# Altium PCB MainBoard.PcbDoc
Units mm, origin at the board's own origin, x right, y up, seen from the top; angles counter-clockwise.
Board outline 127.13 x 121.92 mm, 2 copper layers (Top Layer, Bottom Layer), stack 1.586 mm thick; 101 components, 54 nets, 362 pads, 56 vias.
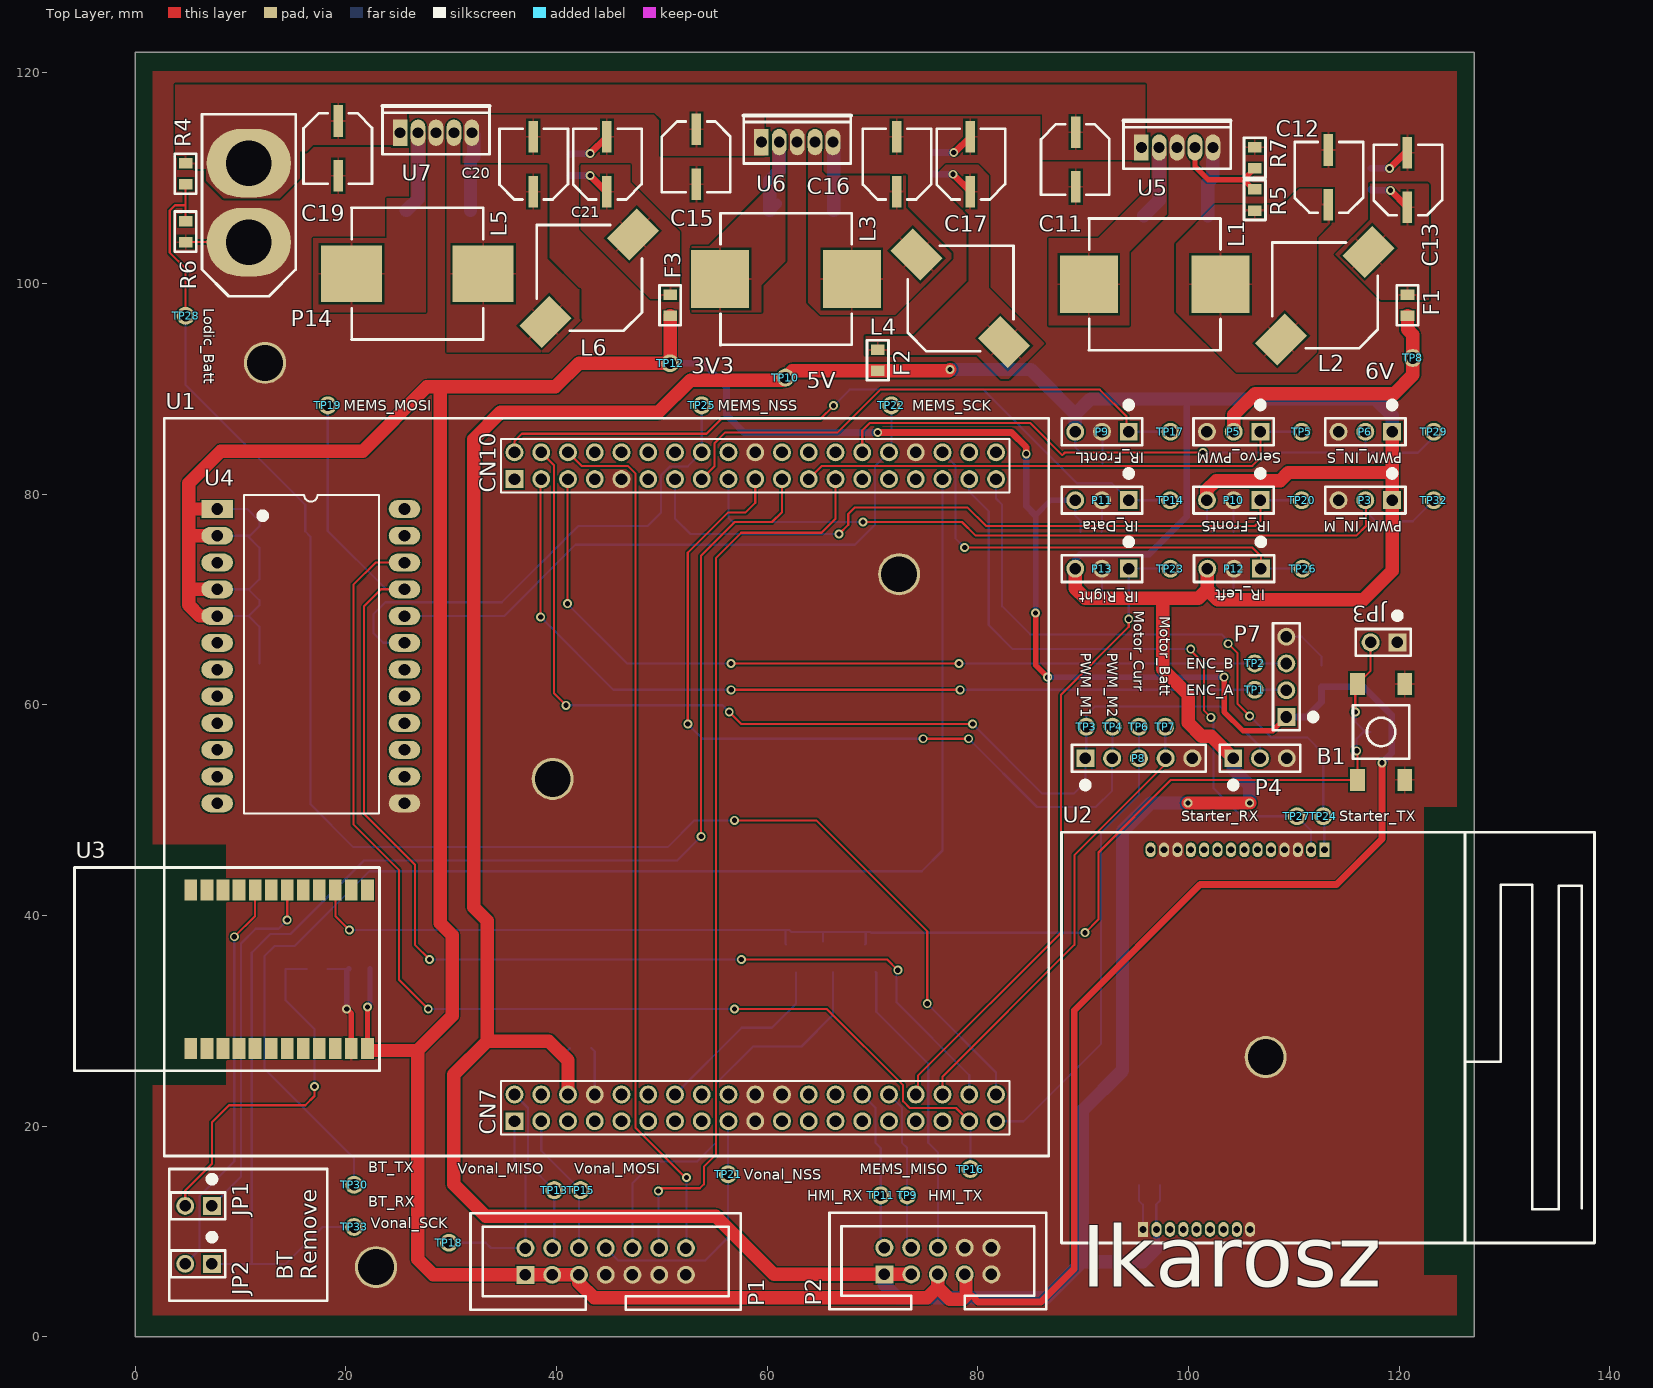
[diagram p0: Top Layer view]
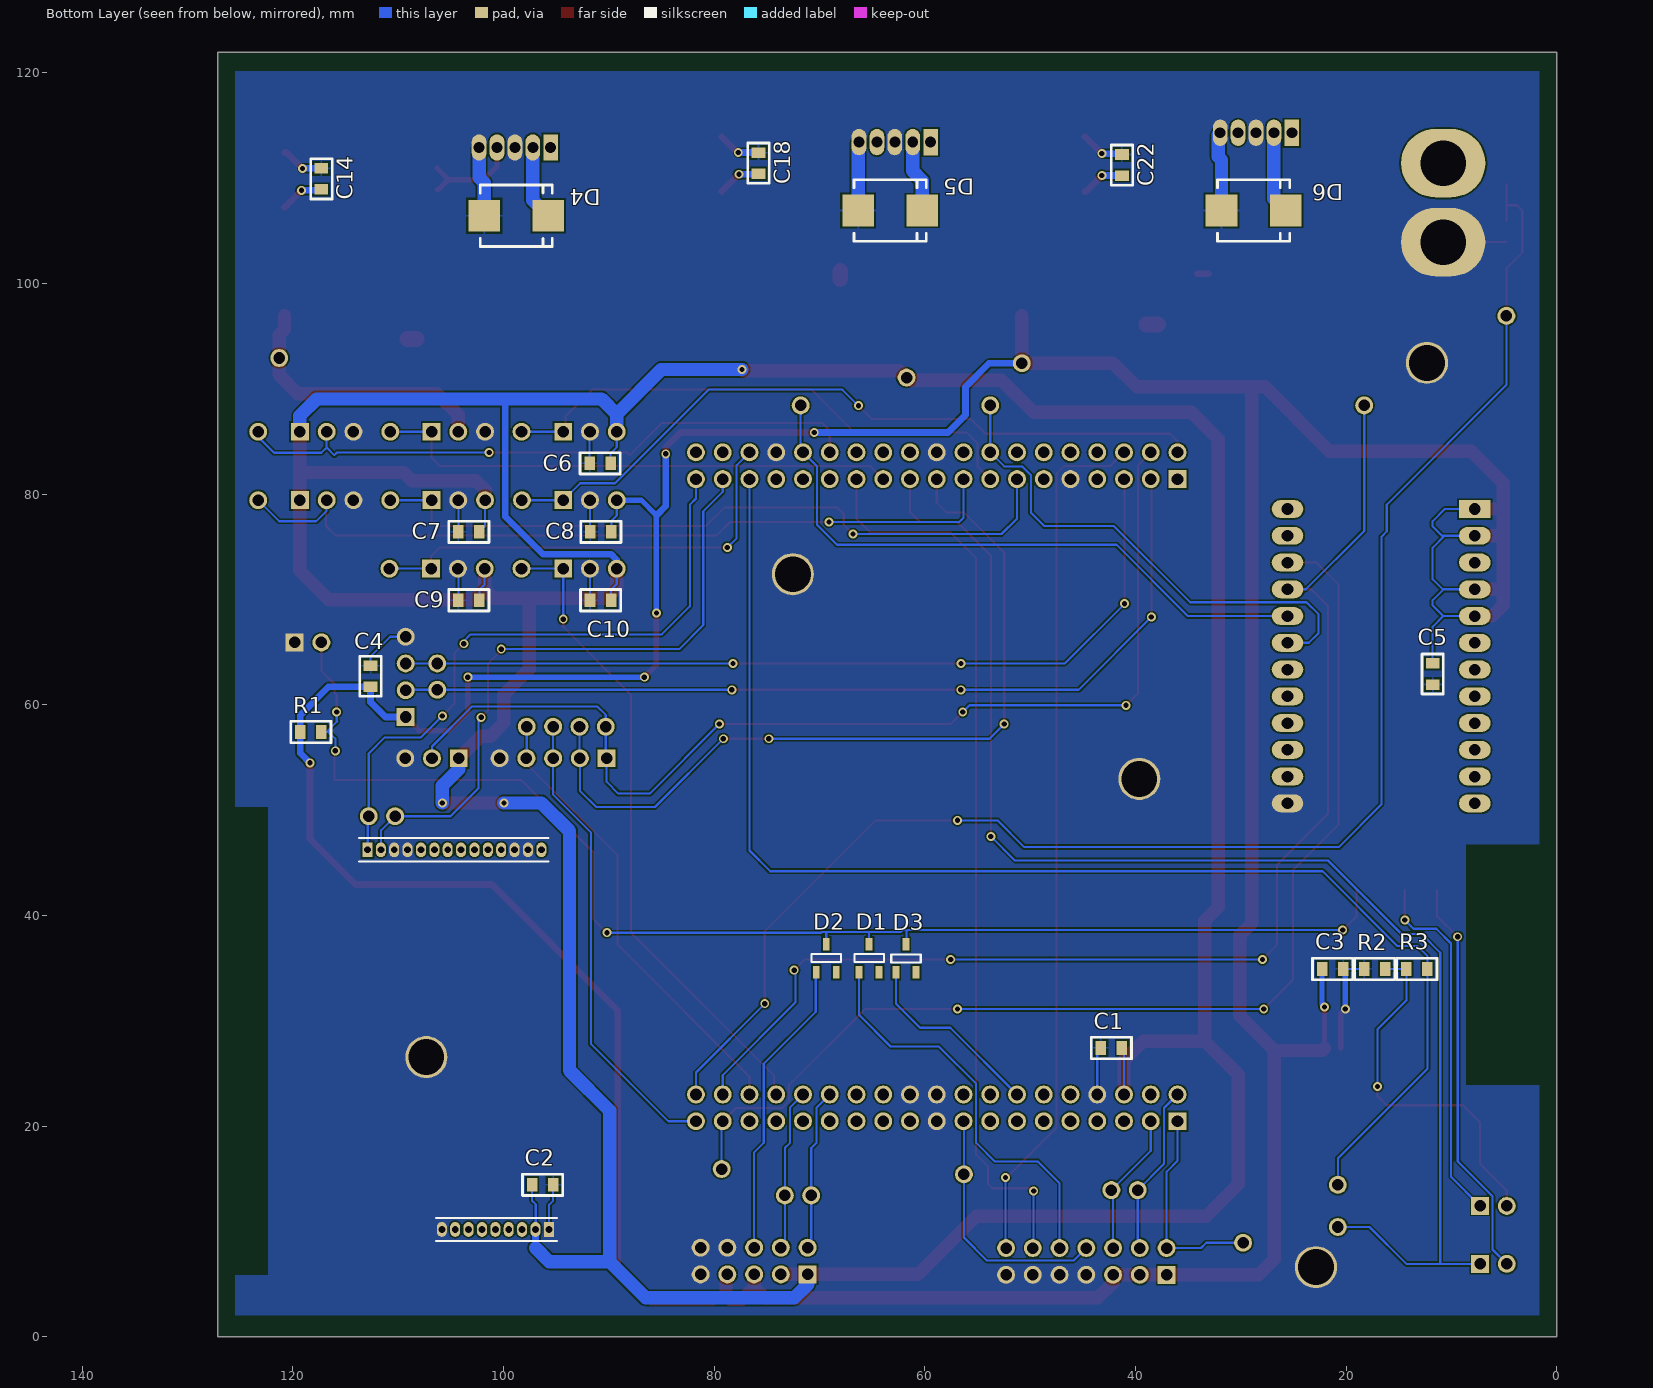
[diagram p1: Bottom Layer view, seen from below]

## Layer stack, top to bottom
Top Solder: solder mask 0.0102, Solder Resist, Dk 3.5
Top Layer: signal copper 0.018
Dielectric1: core 1.55, FR-4, Dk 4.8
Bottom Layer: signal copper 0.018
Bottom Solder: solder mask 0.0102, Solder Resist, Dk 3.5

## Board outline
0,0 0,121.92 127.127,121.92 127.127,0

## Design rules (kind name [scope] priority, off if disabled: settings)
BoardOutlineClearance [All] p1: gap=0.25 ignorepadtopadclearanceinfootprint=FALSE except(0: Arc-SplitContinuation Track-SplitContinuation SMDPad-SplitContinuation THPad-SplitContinuation Via-SplitContinuation Fill-SplitContinuation Poly-SplitContinuation Region-SplitContinuation Text-SplitContinuation)
Clearance Clearance-xPP-xTP-xTT [All] p1: gap=0.15 ignorepadtopadclearanceinfootprint=FALSE except(0: Arc-Hole Track-Hole SMDPad-Hole THPad-Hole Via-Hole Fill-Hole Poly-Hole Region-Hole Text-Hole)
ComponentClearance [All] p1: gap=0.25 collisioncheckmode=3 verticalgap=0.25 showdistances=FALSE
DiffPairsRouting [All] p1: maxlimit=0.25 minlimit=0.25 mostfreqgap=0.25 toplayer_minwidth=0.381 toplayer_maxwidth=0.381 toplayer_prefwidth=0.381 bottomlayer_minwidth=0.381 bottomlayer_maxwidth=0.381 bottomlayer_prefwidth=0.381 maxuncoupledlength=12.5
Height [All] p1: minheight=0 maxheight=25 prefheight=12.5
HoleSize HoleSize-PTH [All] p1: absolutevalues=TRUE maxlimit=5.08 minlimit=0.25 maxpercent=80.000 minpercent=20.000
HoleToHoleClearance [All] p1: gap=0.35 allowstackedmicrovias=TRUE
MinimumAnnularRing "Minimum IAR  >0.45mm" [((ObjectKind = 'Pad') OR (ObjectKind = 'Via')) And (Layer = 'MultiLayer') And (HoleDiameter > AsMM(0.45))] p1: minimumring=0.125 // minimum inner annular ring for pads > 0.45mm finished hole size
MinimumAnnularRing "Minimum IAR <=0.45mm" [((ObjectKind = 'Pad') OR (ObjectKind = 'Via')) And (Layer = 'MultiLayer') And (HoleDiameter <= AsMM(0.45))] p2: minimumring=0.125 // minimum inner annular ring for pads <= 0.45mm finished hole size
MinimumSolderMaskSliver [All] p1: minsoldermaskwidth=0.08
PlaneClearance PlaneClearance-IPI [All] p1: clearance=0.25
PlaneConnect [All] p1: planeconnectstyle=Relief reliefexpansion=0.175 reliefentries=4 reliefconductorwidth=0.2 reliefairgap=0.2
PolygonConnect PolygonConnect-xTW [All] p1: thpad.connectstyle=Direct thpad.reliefconductorwidth=0.2 thpad.reliefentries=4 thpad.polygonreliefangle="90 Angle" thpad.airgapwidth=0.2 smdpad.connectstyle=Relief smdpad.reliefconductorwidth=0.2 smdpad.reliefentries=4 smdpad.polygonreliefangle="90 Angle" smdpad.airgapwidth=0.2 via.connectstyle=Direct via.reliefconductorwidth=0.2 via.reliefentries=4 via.polygonreliefangle="90 Angle" via.airgapwidth=0.2
RoutingCorners [All] p1: cornerstyle=45-Degree minsetback=2.5 maxsetback=2.5
RoutingVias "RoutingVias > 0.45mm" [(ObjectKind = 'Via') And (HoleDiameter > AsMM(0.45))] p1: holewidth=0.5 width=0.85 viastyle="Through Hole" minholewidth=0.5 minwidth=0.85 maxholewidth=0.9 maxwidth=1.25 // finishet hole size > 0.45mm
RoutingVias "RoutingVias <= 0.45mm" [(ObjectKind = 'Via') And (HoleDiameter <= AsMM(0.45))] p2: holewidth=0.3 width=0.65 viastyle="Through Hole" minholewidth=0.25 minwidth=0.6 maxholewidth=0.45 maxwidth=0.8 // finishet hole size <= 0.45mm
SilkToSilkClearance [All] p1: silktosilkclearance=0.2
SilkToSolderMaskClearance SilkscreenOverComponentPads [IsPad] p1: minsilkscreentomaskgap=0.2 clearancetoexposedcopper=TRUE
SolderMaskExpansion [All] p1: expansion=0.102
UnRoutedNet [All] p1: checkbadconnections=TRUE
Width Width-xTW [All] p1: maxlimit=1.5 minlimit=0.15 preferedwidth=0.2
18 further rules are at their usual default settings.

## Classes and differential pairs
component class PSU: C11 C12 C13 C14 C15 C16 C17 C18 C19 C20 C21 C22 D4 D5 D6 F1 F2 F3 L1 L2 L3 L4 L5 L6 P14 R4 R5 R6 R7 U5 U6 U7
component class MainBoard: B1 C1 C2 C3 C4 C5 C6 C7 C8 C9 C10 D1 D2 D3 JP1 JP2 JP3 P1 P2 P3 P4 P5 P6 P7 P8 P9 P10 P11 P12 P13 R1 R2 R3 TP1 TP2 TP3 TP4 TP5 TP6 TP7 TP8 TP9 TP10 TP11 TP12 TP13 TP14 TP15 TP16 TP17 TP18 TP19 TP20 TP21 TP22 TP23 TP24 TP25 TP26 TP27 TP28 TP29 TP30 TP32 TP33 U1 U2 U3 U4

## Components (designator, comment, footprint, x,y, rotation, side; value= is the part's Value field where it differs from the comment)
B1 "Button" FP_BTN_SMD 118.276,57.417 r180 top
C1 "100nF" FP_0805_CAP_085 42.276,27.417 r180 bottom
C2 "100nF" FP_0805_CAP_085 96.276,14.417 r180 bottom
C3 "100nF" FP_0805_CAP_085 21.276,34.917 r180 bottom
C4 "100nF" FP_0805_CAP_085 112.606,62.707 r90 bottom
C5 "100nF" FP_0805_CAP_085 11.776,62.917 r270 bottom
C6 "100nF" FP_0805_CAP_085 90.816,82.917 r0 bottom
C7 "100nF" FP_0805_CAP_085 103.276,76.417 r0 bottom
C8 "100nF" FP_0805_CAP_085 90.736,76.417 r0 bottom
C9 "100nF" FP_0805_CAP_085 103.276,69.917 r0 bottom
C10 "100nF" FP_0805_CAP_085 90.776,69.917 r0 bottom
C11 "100uF" FP_CAP_ELKO_6,3X6,3 89.276,113.917 r270 top
C12 "200uF" FP_CAP_ELKO_6,3X6,3 113.276,107.917 r90 top
C13 "100uF" FP_CAP_ELKO_6,3X6,3 120.776,107.667 r90 top
C14 "100nF" FP_0805_CAP_085 117.276,109.917 r270 bottom
C15 "100uF" FP_CAP_ELKO_6,3X6,3 53.276,114.167 r270 top
C16 "470uF" FP_CAP_ELKO_6,3X6,3 72.276,109.167 r90 top
C17 "100uF" FP_CAP_ELKO_6,3X6,3 79.276,109.167 r90 top
C18 "100nF" FP_0805_CAP_085 75.776,111.417 r270 bottom
C19 "100uF" FP_CAP_ELKO_6,3X6,3 19.276,114.967 r270 top
C20 "470uF" FP_CAP_ELKO_6,3X6,3 37.776,109.167 r90 top
C21 "100uF" FP_CAP_ELKO_6,3X6,3 44.776,109.167 r90 top
C22 "100nF" FP_0805_CAP_085 41.275,111.236 r270 bottom
D1 "BAT54" FP_SOT23-3 65.278,35.941 r270 bottom
D2 "BAT54" FP_SOT23-3 69.342,35.941 r270 bottom
D3 "BAT54" FP_SOT23-3 61.776,35.917 r270 bottom
D4 "DO-214AB" FP_SMC 98.776,106.417 r180 bottom
D5 "DO-214AB" FP_SMC 63.276,106.917 r180 bottom
D6 "DO-214AB" FP_SMC 28.776,106.917 r180 bottom
F1 "2.0A Fast" FP_0805_RES 120.776,97.917 r270 top
F2 "1.5A Fast" FP_0805_RES 70.485,92.71 r270 top
F3 "2.0A Fast" FP_0805_RES 50.776,97.917 r270 top
JP1 "" FP_CONN2_TUSKE_254MM 7.276,12.417 r90 top
JP2 "" FP_CONN2_TUSKE_254MM 7.276,6.917 r90 top
JP3 "" FP_CONN2_TUSKE_254MM 119.816,65.917 r90 top
L1 "150uH" FP_IND_12.3X12.3 96.776,99.917 r270 top
L2 "22uH" FP_IND_10X10 107.95,103.886 r0 top
L3 "150uH" FP_IND_12.3X12.3 61.776,100.417 r270 top
L4 "22uH" FP_IND_10X10 83.376,103.569 r270 top
L5 "100uH" FP_IND_12.5X12.5 26.776,100.917 r270 top
L6 "22uH" FP_IND_10X10 38.1,105.537 r0 top
P1 "Vonalszenzor" FP_CONN14 37.036,5.877 r0 top
P2 "HMI" FP_CONN10 71.116,5.917 r0 top
P3 "RC_Servo" FP_CONN3_TUSKE_254MM 119.316,79.417 r90 top
P4 "Stock_Motor" FP_CONN3_TUSKE_254MM 104.236,54.917 r270 top
P5 "Servo" FP_CONN3_TUSKE_254MM 106.816,85.917 r90 top
P6 "RC_Motor" FP_CONN3_TUSKE_254MM 119.316,85.917 r90 top
P7 "Encoder" FP_CONN4_TUSKE_254MM 109.276,58.837 r0 top
P8 "Motor" FP_CONN5_TUSKE_254MM 90.196,54.917 r270 top
P9 "IR Long" FP_CONN3_TUSKE_254MM 94.316,85.917 r90 top
P10 "IR Short" FP_CONN3_TUSKE_254MM 106.816,79.417 r90 top
P11 "IR Data" FP_CONN3_TUSKE_254MM 94.316,79.417 r90 top
P12 "IR Short" FP_CONN3_TUSKE_254MM 106.856,72.917 r90 top
P13 "IR Short" FP_CONN3_TUSKE_254MM 94.316,72.917 r90 top
P14 "Logika akkumulátor" FP_XT60 10.776,107.667 r90 top
R1 "3K" FP_0805_RES 118.276,57.417 r0 bottom
R2 "100K" FP_0805_RES 17.276,34.917 r180 bottom
R3 "2K" FP_0805_RES 13.276,34.917 r0 bottom
R4 "1.27K, 1%" FP_0805_RES 4.776,110.417 r90 top
R5 "6.98K, 1%" FP_0805_RES 106.276,107.917 r270 top
R6 "5K, 1%" FP_0805_RES 4.776,104.917 r90 top
R7 "1.18K, 1%" FP_0805_RES 106.276,111.917 r270 top
TP1 "ENC_A" FP_TESTPOINT 106.276,61.417 r0 top
TP2 "ENC_B" FP_TESTPOINT 106.276,63.917 r90 top
TP3 "PWM_M1" FP_TESTPOINT 90.276,57.917 r0 top
TP4 "PWM_M2" FP_TESTPOINT 92.776,57.917 r0 top
TP5 "Servo_PWM" FP_TESTPOINT 110.736,85.917 r270 top
TP6 "Motor_Curr" FP_TESTPOINT 95.276,57.917 r0 top
TP7 "Motor_Batt" FP_TESTPOINT 97.776,57.917 r0 top
TP8 "6V" FP_TESTPOINT 121.276,92.917 r90 top
TP9 "HMI_TX" FP_TESTPOINT 73.276,13.417 r90 top
TP10 "5V" FP_TESTPOINT 61.722,91.059 r90 top
TP11 "HMI_RX" FP_TESTPOINT 70.776,13.417 r90 top
TP12 "3V3" FP_TESTPOINT 50.776,92.417 r90 top
TP13 "Vonal_MISO" FP_TESTPOINT 39.776,13.917 r90 top
TP14 "IR_Data" FP_TESTPOINT 98.236,79.417 r180 top
TP15 "Vonal_MOSI" FP_TESTPOINT 42.276,13.917 r90 top
TP16 "MEMS_MISO" FP_TESTPOINT 79.276,15.917 r90 top
TP17 "IR_FrontL" FP_TESTPOINT 98.276,85.917 r180 top
TP18 "Vonal_SCK" FP_TESTPOINT 29.776,8.917 r90 top
TP19 "MEMS_MOSI" FP_TESTPOINT 18.276,88.417 r90 top
TP20 "IR_FrontS" FP_TESTPOINT 110.736,79.417 r180 top
TP21 "Vonal_NSS" FP_TESTPOINT 56.276,15.417 r90 top
TP22 "MEMS_SCK" FP_TESTPOINT 71.776,88.417 r90 top
TP23 "IR_Right" FP_TESTPOINT 98.276,72.917 r180 top
TP24 "Starter_TX" FP_TESTPOINT 112.776,49.417 r90 top
TP25 "MEMS_NSS" FP_TESTPOINT 53.776,88.417 r90 top
TP26 "IR_Left" FP_TESTPOINT 110.816,72.917 r180 top
TP27 "Starter_RX" FP_TESTPOINT 110.276,49.417 r90 top
TP28 "Lodic_Batt" FP_TESTPOINT 4.776,96.917 r90 top
TP29 "PWM_IN_S" FP_TESTPOINT 123.276,85.917 r180 top
TP30 "BT_TX" FP_TESTPOINT 20.776,14.417 r90 top
TP32 "PWM_IN_M" FP_TESTPOINT 123.276,79.417 r180 top
TP33 "BT_RX" FP_TESTPOINT 20.776,10.417 r90 top
U1 "NUCLEO-F446RE" FP_NUCLEO-64 35.996,20.457 r90 top
U2 "WES1000" FP_WES1000 87.935,47.904 r270 top
U3 "SPBT3.0DP1" BLUETOOTH 13.658,34.897 r180 top
U4 "STEVAL-MKI160V1" FP_DIP24 16.666,74.767 r0 top
U5 "LM2576-ADJ" FP_TO220-5 98.904,112.903 r0 top
U6 "LM2576-5" FP_TO220-5 62.836,113.411 r0 top
U7 "LM2576-3.3" FP_TO220-5 28.546,114.3 r0 top

## Footprints (in the part's own frame and the unit in brackets; to place one, negate y for a bottom-side part, rotate by r counter-clockwise, add the part's x,y. Pads: shape width x height; smd on the part's side, far side on the other; paste and mask are expansions set on the pad)
BLUETOOTH [mm]
  rect 1.2x2 smd: 1(-8.382,-7.52) 2(-6.858,-7.52) 3(-5.334,-7.52) 4(-3.81,-7.52) 5(-2.286,-7.52) 6(-0.762,-7.52) 7(0.762,-7.52) 8(2.286,-7.52) 9(3.81,-7.52) 10(5.334,-7.52) 11(6.858,-7.52) 12(8.382,-7.52) 13(8.382,7.52) 14(6.858,7.52) 15(5.334,7.52) 16(3.81,7.52) 17(2.3,7.52) 18(0.762,7.52) 19(-0.762,7.52) 20(-2.286,7.52) 21(-3.81,7.52) 22(-5.334,7.52) 23(-6.858,7.52) 24(-8.382,7.52)
  silkscreen extent -9.53,-9.65 19.43,9.65
FP_0805_CAP_085 [mm] "0805 kapacitás YAGEO 0.85mm magas"
  rect 1x1.3 smd: 1(-1,0) 2(1,0)
  silkscreen extent -1.91,-1.02 1.91,1.02, body extent -1,-0.64 1.03,0.64, height 0.85
FP_0805_RES [mm] "0805 ellenállás"
  rect 1x1.3 smd: 1(-1,0) 2(1,0)
  silkscreen extent -1.91,-1.02 1.91,1.02, body extent -1,-0.62 1,0.63, height 0.62
FP_BTN_SMD [mm] "SMD Push Button 6x6mm"
  rect 1.4x2.1 smd: 1(2.25,4.55) 2(2.25,-4.55) 3(-2.25,4.55) 4(-2.25,-4.55)
  silkscreen extent -2.67,-2.54 2.67,2.54, body extent -3,-5 3,5, height 5.1
FP_CAP_ELKO_6,3X6,3 [mm] "680 uF/SMD-NIC 47 uF/SMD-NIC ELKO 16 V 105°C 20 % KIS IMPEDANCIÁS SMD O6,3x6,3mm"
  rect 3x0.9 smd: N(4.75,0) P(-0.45,0)
  silkscreen extent -1.2,-3.3 5.5,3.2, body extent -1.25,-3.3 5.35,3.3, height 6.3
FP_CONN2_TUSKE_254MM [mm] "3×1 tüskesor"
  rect 1.7x1.7 hole 1.1: 1(0,0)
  round 1.7 hole 1.1: 2(0,2.54)
  silkscreen extent -1.27,-1.27 2.84,3.94, body extent -1.27,-1.27 1.27,3.81, height 8.54
FP_CONN3_TUSKE_254MM [mm] "3×1 tüskesor"
  rect 1.7x1.7 hole 1.1: 1(0,0)
  round 1.7 hole 1.1: 2(0,2.54) 3(0,5.08)
  silkscreen extent -1.27,-1.27 2.84,6.35, body extent -1.27,-1.27 1.27,6.35, height 8.54
FP_CONN4_TUSKE_254MM [mm] "4×1 tüskesor"
  rect 1.7x1.7 hole 1.1: 1(0,0)
  round 1.7 hole 1.1: 2(0,2.54) 3(0,5.08) 4(0,7.62)
  silkscreen extent -1.27,-1.27 2.84,8.9, body extent -1.27,-1.27 1.27,8.89, height 8.54
FP_CONN5_TUSKE_254MM [mm] "5×1 tüskesor"
  rect 1.7x1.7 hole 1.1: 1(0,0)
  round 1.7 hole 1.1: 2(0,2.54) 3(0,5.08) 4(0,7.62) 5(0,10.16)
  silkscreen extent -1.27,-1.27 2.84,11.43
FP_CONN10 [mm]
  rect 1.7x1.7 hole 1.1: 1(0,0)
  round 1.7 hole 1.1: 2(0,2.54) 3(2.54,0) 4(2.54,2.54) 5(5.08,0) 6(5.08,2.54) 7(7.62,0) 8(7.62,2.54) 9(10.16,0) 10(10.16,2.54)
  silkscreen extent -5.21,-3.3 15.37,5.84
FP_CONN14 [mm]
  rect 1.7x1.7 hole 1.1: 1(0,0)
  round 1.7 hole 1.1: 2(0,2.54) 3(2.54,0) 4(2.54,2.54) 5(5.08,0) 6(5.08,2.54) 7(7.62,0) 8(7.62,2.54) 9(10.16,0) 10(10.16,2.54) 11(12.7,0) 12(12.7,2.54) 13(15.24,0) 14(15.24,2.54)
  silkscreen extent -5.21,-3.3 20.45,5.84
FP_DIP24 [mm] "DIP; 28 Leads; Row Spacing 7.62 mm; Pitch 2.54 mm"
  rect 3x1.7 hole 1.1: 1(-8.89,3.81)
  oval 3x1.7 hole 1.1: 2(-8.89,1.27) 3(-8.89,-1.27) 4(-8.89,-3.81) 5(-8.89,-6.35) 6(-8.89,-8.89) 7(-8.89,-11.43) 8(-8.89,-13.97) 9(-8.89,-16.51) 10(-8.89,-19.05) 11(-8.89,-21.59) 12(-8.89,-24.13) 13(8.89,-24.13) 14(8.89,-21.59) 15(8.89,-19.05) 16(8.89,-16.51) 17(8.89,-13.97) 18(8.89,-11.43) 19(8.89,-8.89) 20(8.89,-6.35) 21(8.89,-3.81) 22(8.89,-1.27) 23(8.89,1.27) 24(8.89,3.81)
  silkscreen extent -6.35,-25.09 6.48,5.15
FP_IND_10X10 [mm] "Inductor"
  rect 3x4 smd rot 135: 1(0.826,-9.207) 2(9.144,-0.889)
  silkscreen extent 0,-10.03 10,0
FP_IND_12.3X12.3 [mm] "Inductor"
  rect 5.5x5.5 smd: 1(0,-6.25) 2(0,6.25)
  silkscreen extent -6.25,-6.25 6.28,6.25
FP_IND_12.5X12.5 [mm] "Inductor"
  rect 5.4x5.8 smd: 1(0,-6.25) 2(0,6.25)
  silkscreen extent -6.25,-6.25 6.28,6.25
FP_NUCLEO-64 [mm]
  rect 1.7x1.7 hole 1.1: 1(0,0) 39(60.96,0)
  round 1.7 hole 1.1: 2(2.54,0) 3(0,-2.54) 4(2.54,-2.54) 5(0,-5.08) 6(2.54,-5.08) 7(0,-7.62) 8(2.54,-7.62) 9(0,-10.16) 10(2.54,-10.16) 11(0,-12.7) 12(2.54,-12.7) 13(0,-15.24) 14(2.54,-15.24) 15(0,-17.78) 16(2.54,-17.78) 17(0,-20.32) 18(2.54,-20.32) 19(0,-22.86) 20(2.54,-22.86) 21(0,-25.4) 22(2.54,-25.4) 23(0,-27.94) 24(2.54,-27.94) 25(0,-30.48) 26(2.54,-30.48) 27(0,-33.02) 28(2.54,-33.02) 29(0,-35.56) 30(2.54,-35.56) 31(0,-38.1) 32(2.54,-38.1) 33(0,-40.64) 34(2.54,-40.64) 35(0,-43.18) 36(2.54,-43.18) 37(0,-45.72) 38(2.54,-45.72) 40(63.5,0) 41(60.96,-2.54) 42(63.5,-2.54) 43(60.96,-5.08) 44(63.5,-5.08) 45(60.96,-7.62) 46(63.5,-7.62) 47(60.96,-10.16) 48(63.5,-10.16) 49(60.96,-12.7) 50(63.5,-12.7) 51(60.96,-15.24) 52(63.5,-15.24) 53(60.96,-17.78) 54(63.5,-17.78) 55(60.96,-20.32) 56(63.5,-20.32) 57(60.96,-22.86) 58(63.5,-22.86) 59(60.96,-25.4) 60(63.5,-25.4) 61(60.96,-27.94) 62(63.5,-27.94) 63(60.96,-30.48) 64(63.5,-30.48) 65(60.96,-33.02) 66(63.5,-33.02) 67(60.96,-35.56) 68(63.5,-35.56) 69(60.96,-38.1) 70(63.5,-38.1) 71(60.96,-40.64) 72(63.5,-40.64) 73(60.96,-43.18) 74(63.5,-43.18) 75(60.96,-45.72) 76(63.5,-45.72)
  silkscreen extent -3.3,-50.72 66.72,33.25, body extent -3.3,-50.72 66.72,33.25, height 11
FP_SMC [mm] "Diode"
  rect 3x3 smd: 1(3.048,0) 2(-3.048,0)
  silkscreen extent -3.43,-2.92 3.43,2.92
FP_SOT23-3 [mm] "SOT23-3 tok"
  rect 1.2x0.65 smd: 1(1.327,-0.95) 2(1.327,0.95) 3(-1.327,0)
  silkscreen extent -0.38,-1.4 0.38,1.4, body extent -1.27,-1.46 1.27,1.46, height 0.97
FP_TESTPOINT [mm] "TestPoint"
  round 1.7 hole 1.1: 1(0,0)
FP_TO220-5 [mm]
  rect 1.4x2.5 hole 1.04: 1(-3.4,0)
  oval 1.4x2.5 hole 1.04: 2(-1.7,0) 3(0,0) 4(1.7,0) 5(3.4,0)
  silkscreen extent -5.08,-2.03 5.08,2.54
FP_WES1000 [mm]
  rect 1.4x0.95 hole 0.65 mask+0.1: 1(1.676,24.968) 15(37.719,7.747)
  oval 1.4x0.95 hole 0.65 mask+0.1: 2(1.676,23.698) 3(1.676,22.428) 4(1.676,21.158) 5(1.676,19.888) 6(1.676,18.618) 7(1.676,17.348) 8(1.676,16.078) 9(1.676,14.808) 10(1.676,13.538) 11(1.676,12.268) 12(1.676,10.998) 13(1.676,9.728) 14(1.676,8.458) 16(37.719,9.017) 17(37.719,10.287) 18(37.719,11.557) 19(37.719,12.827) 20(37.719,14.097) 21(37.719,15.367) 22(37.719,16.637) 23(37.719,17.907)
  Top Layer pour cut-out: 0,38.3 0,50.6 39,50.6 39,38.3
  Bottom Layer pour cut-out: 0,38.3 0,50.6 39,50.6 39,38.3
  silkscreen extent 0,0 39,50.6, body extent -0.13,-0.13 39.13,50.73, height 2
FP_XT60 [mm] "XT60 connector"
  oval 6.5x8 hole 4.3: 1(3.75,0) 2(-3.75,0)
  silkscreen extent -8.89,-4.45 8.38,4.45

## Part data
B1: library part "Button 4P", "Push button"
C1 C2 C3 C4 C5 C6 C7 C8 C9 C10 C14 C18 C22: library part CAP, "Capacitor"
C11 C12 C13 C15 C16 C17 C19 C20 C21: library part CAP_ELECT, "Polarized Capacitor"
D1 D2 D3 D4 D5 D6: library part SCHOTTKY, "Schottky diode"
F1 F2 F3: library part Fuse, "Fuse"
JP1 JP2 JP3: library part JUMPER, "Jumper Wire"
L1 L2 L3 L4 L5 L6: library part IND, "Inductor"
P1: library part Connector_14pin, "14pin Connector"
P2: library part Connector_10pin, "10pin Connector"
P3 P4 P5 P6 P9 P10 P11 P12 P13: library part Connector_3pin, "3pin connector"
P7: library part Connector_4pin, "4pin Connector"
P8: library part Connector_5pin, "5pin Connector"
P14: library part Connector_2pin, "2pin connector"
R1 R2 R3 R4 R5 R6 R7: library part RES, "Resistor"
TP1 TP2 TP3 TP4 TP5 TP6 TP7 TP8 TP9 TP10 TP11 TP12 TP13 TP14 TP15 TP16 TP17 TP18 TP19 TP20 TP21 TP22 TP23 TP24 TP25 TP26 TP27 TP28 TP29 TP30 TP32 TP33: library part TestPoint, "Test Point"
U2: "SiLabs vezeték nélküli modul"
U3: "Bluetooth 3.0 modul"
U4: "Inierciális modul"
U5 U6 U7: library part LM2576, "3-A Step-Down Voltage Regulator"
U1: Name="Nucleo F446RE", Reference=NUCLEO, Supplier=Tanszék

## Free pads (board coordinates)
  round 4 hole 3.4: ""(12.319,92.456) ""(22.86,6.604) ""(39.624,52.959) ""(72.517,72.39) ""(107.315,26.543)

## Via types
v1: diameter 0.85, hole 0.5, Top Layer to Bottom Layer, 56 vias

## Nets (pads, with @x,y where several pads share a name; then routed paths per layer and width w, separated by ;. In a path a pad name is that pad's centre, name@x,y a point inside that pad or via, vN(x,y) a via of type N, cw(c..) or ccw(c..) an arc to the next point about the centre after c; other vN are vias at no path point)
3V3: C3.1 C4.1 C5.1 C8.1 F3.2 P1.1 P1.3 P1.5 P2.5 P2.7 P7.1 P11.3 R1.2 TP12.1 U3.24 U4.1 U4.2 U4.4 U4.5 | length 456.7
  Top Layer w0.508: U3.24 v1(22.04,31.311) ; v1(85.471,68.707) 85.471,63.754 v1(86.614,62.611) ; v1(103.378,62.611) 103.378,59.309 105.156,57.531 107.97,57.531 P7.1
  Top Layer w0.635: v1(70.485,85.852) 83.185,85.852 84.582,84.455 v1(84.582,83.82) ; 78.867,3.937 79.375,3.937 80.01,3.302 85.979,3.302 89.154,6.477 89.154,30.988 101.092,42.926 114.046,42.926 118.364,47.244 v1(118.364,54.483)
  Top Layer w1.27: U4.5 6.132,68.417 5.08,69.469 5.08,71.12 ; U4.4 5.243,70.957 5.08,71.12 ; U4.2 5.171,76.037 5.08,75.946 ; U4.1 5.171,78.577 5.08,78.486 ; U3.24 22.239,27.178 26.797,27.178 ; F3.2 TP12.1 42.125,92.417 39.878,90.17 28.956,90.17 ; P2.5 76.196,4.695 ; P2.7 78.867,5.786 78.867,3.937 78.486,3.556 77.335,3.556 76.196,4.695 ; 5.08,71.12 5.08,75.946 ; 5.08,75.946 5.08,78.486 ; 5.08,78.486 5.08,81.026 8.128,84.074 21.59,84.074 27.686,90.17 28.956,90.17 ; 26.797,27.178 26.797,7.366 28.286,5.877 P1.1 P1.3 P1.5 42.116,5.128 43.561,3.683 75.184,3.683 76.196,4.695 ; 26.797,27.178 30.099,30.48 30.099,38.1 28.956,39.243 28.956,90.17
  Bottom Layer w0.203: U4.5 10.776,68.417 ; U4.4 10.736,70.957 ; U4.2 10.656,76.037 ; U4.1 10.616,78.577 11.776,77.417 11.776,76.917 10.896,76.037 10.656,76.037 ; C5.1 11.776,67.417 10.776,68.417 ; P11.3 89.236,77.957 89.736,77.457 C8.1 ; 10.656,76.037 11.776,74.917 11.776,71.917 10.816,70.957 10.736,70.957 ; 10.736,70.957 11.776,69.917 11.776,69.417 10.776,68.417
  Bottom Layer w0.508: v1(22.04,31.311) 22.276,31.547 C3.1 ; v1(85.471,68.707) 85.471,77.978 86.91,79.417 P11.3 ; v1(86.614,62.611) v1(103.378,62.611)
  Bottom Layer w0.635: TP12.1 53.887,92.417 56.134,90.17 56.134,87.503 57.785,85.852 v1(70.485,85.852) ; v1(84.582,83.82) 84.582,78.867 85.471,77.978 ; P7.1 111.196,58.837 112.606,60.247 C4.1 116.601,61.707 119.276,59.032 R1.2 119.276,55.395 v1(118.364,54.483)
5V: C1.2 C2.1 C6.1 C7.1 C9.1 C10.1 F2.2 P2.1 P2.3 P3.1 P4.1 P6.1 P9.3 P10.3 P12.3 P13.3 TP10.1 U1.6 U2.16 | length 452.2
  Top Layer w1.27: U1.6 41.076,26.234 39.243,28.067 33.401,28.067 ; P2.3 P2.1 60.631,5.917 55.118,11.43 33.274,11.43 30.226,14.478 30.226,24.892 33.401,28.067 ; v1(77.343,91.821) 77.232,91.71 F2.2 62.373,91.71 TP10.1 61.468,90.805 52.705,90.805 49.657,87.757 34.671,87.757 32.131,85.217 32.131,40.767 33.401,39.497 33.401,28.067 ; P13.3 89.236,71.038 90.17,70.104 97.536,70.104 ; v1(99.949,50.673) v1(105.791,50.673) ; P10.3 101.736,80.4 102.616,81.28 108.712,81.28 109.474,82.042 119.316,82.042 ; P12.3 101.776,70.944 ; P4.1 102.13,57.023 101.219,57.023 99.949,58.293 99.949,60.96 97.536,63.373 97.536,70.104 ; P6.1 119.316,82.042 ; 97.536,70.104 100.936,70.104 101.776,70.944 ; 101.776,70.944 102.743,69.977 116.586,69.977 119.316,72.707 P3.1 119.316,82.042
  Bottom Layer w0.203: U1.6 41.076,27.217 C1.2 ; P13.3 89.236,71.457 89.776,70.917 C10.1 ; P9.3 89.236,84.457 89.816,83.877 C6.1 ; U2.16@96.926,10.417 96.926,12.567 97.276,12.917 C2.1 ; P10.3 101.736,76.957 C7.1 ; P12.3 101.776,71.417 102.276,70.917 C9.1
  Bottom Layer w0.635: P13.3 89.236,73.742 89.789,74.295 96.266,74.295 99.822,77.851 99.822,88.9 99.695,89.027 ; U2.16@96.926,10.417 96.941,10.402 96.941,8.422
  Bottom Layer w1.27: P2.1 71.116,4.957 72.39,3.683 86.487,3.683 89.916,7.112 ; v1(77.343,91.821) 85,91.821 89.236,87.585 ; P9.3 89.236,87.585 ; 96.941,8.422 95.631,7.112 89.916,7.112 ; v1(99.949,50.673) 96.393,50.673 93.726,48.006 93.726,25.273 89.916,21.463 89.916,7.112 ; P4.1 104.236,53.879 105.791,52.324 v1(105.791,50.673) ; P6.1 119.316,87.44 117.729,89.027 99.695,89.027 90.678,89.027 89.236,87.585
6V: F1.2 P5.2 TP8.1 | length 26
  Top Layer w1.27: P5.2 104.276,87.512 106.299,89.535 119.507,89.535 121.276,91.304 TP8.1 121.276,95.132 120.777,95.631 F1.2 F1.2
BT_RST: B1.1 B1.2 D1.3 D2.3 D3.3 JP3.2 R1.1 U3.3 | length 128.4
  Top Layer w0.203: U3.3 18.992,39.936 v1(20.32,38.608) ; v1(90.17,38.354) 91.44,39.624 91.44,45.974 98.333,52.867 B1.1 116.026,55.551 v1(115.951,55.626) ; v1(115.824,59.309) 115.824,60.96 116.026,61.162 B1.2 117.276,63.217 JP3.2
  Bottom Layer w0.203: v1(20.32,38.608) 61.722,38.608 ; D3.3 61.722,37.298 61.722,38.608 ; D1.3@65.278,37.522 65.278,38.417 ; D2.3@69.276,37.244 69.342,37.31 69.342,38.417 ; v1(90.17,38.354) 69.85,38.354 69.787,38.417 69.342,38.417 ; v1(115.824,59.309) 115.824,58.465 115.776,58.417 R1.1@116.776,57.417 ; v1(115.951,55.626) 115.951,56.769 116.599,57.417 R1.1@116.776,57.417 ; R1.1 R1.1@116.776,57.417 ; 61.722,38.608 62.085,38.608 62.276,38.417 65.278,38.417 ; 65.278,38.417 65.776,38.417 69.342,38.417
BT_RX: JP2.1 TP33.1 U1.59 | length 130.9
  Top Layer w0.203: v1(53.721,47.498) 53.721,74.168 56.896,77.343 60.452,77.343 61.396,78.287 U1.59
  Bottom Layer w0.203: JP2.1 11.049,6.917 ; TP33.1 17.776,10.417 14.276,6.917 11.049,6.917 ; v1(53.721,47.498) 51.435,45.212 21.717,45.212 14.732,38.227 12.827,38.227 11.049,36.449 11.049,6.917
BT_TX: R3.1 TP30.1 U1.71 | length 129
  Bottom Layer w0.203: TP30.1 20.776,16.917 12.276,25.417 R3.1 12.276,36.152 13.208,37.084 15.113,37.084 22.225,44.196 74.676,44.196 76.636,46.156 U1.71
ENC_A: P7.2 TP1.1 U1.41 | length 86.8
  Top Layer w0.203: v1(38.481,68.326) 38.481,81.362 U1.41 ; v1(56.566,61.417) v1(78.308,61.417)
  Bottom Layer w0.203: v1(38.481,68.326) 45.39,61.417 v1(56.566,61.417) ; v1(78.308,61.417) TP1.1 109.236,61.417 P7.2
ENC_B: P7.3 TP2.1 U1.43 | length 82.5
  Top Layer w0.203: v1(41.021,69.596) 41.021,81.362 U1.43 ; v1(56.551,63.917) v1(78.196,63.917)
  Bottom Layer w0.203: v1(41.021,69.596) 46.7,63.917 v1(56.551,63.917) ; v1(78.196,63.917) TP2.1 P7.3
ENC_Ind: U1.21
F4_RST: D3.1 U1.14 | length 18
  Bottom Layer w0.203: U1.14 57.576,29.337 60.452,29.337 62.726,31.611 D3.1
GND: B1.3 B1.4 C1.1 C2.2 C3.2 C4.2 C5.2 C6.2 C7.2 C8.2 C9.2 C10.2 C11.N C12.N C13.N C14.1 C15.N C16.N C17.N C18.1 C19.N C20.N C21.N C22.1 D4.2 D5.2 D6.2 JP3.1 P1.7 P1.9 P1.11 P1.13 P2.8 P2.9 P2.10 P3.3 P4.3 P5.3 P6.3 P7.4 P8.5 P9.2 P10.2 P11.2 P12.2 P13.2 P14.2 pad. R2.1 R6.1 R7.1 U1.8 U1.19 U1.20 U1.22 U1.47 U1.58 U1.70 U2.3 U2.4 U2.12 U2.13 U2.15 U2.23 U3.23 U4.13 U5.3 U5.5 U6.3 U6.5 U7.3 U7.5 | length 77.8
  Top Layer w0.203: R6.1 P14.2
  Top Layer w0.508: v1(20.066,31.115) 20.516,30.665 U3.23
  Top Layer w0.635: v1(43.18,112.321) C21.N ; v1(77.702,112.417) 77.776,112.417 C17.N ; v1(119.08,110.917) 120.58,112.417 C13.N
  Bottom Layer w0.203: R2.1 C3.2 ; C1.1 43.616,27.077 U1.8 ; C8.2 91.776,76.457 P11.2 ; C10.2 P13.2 ; P9.2 91.816,85.877 C6.2 ; C2.2 95.276,12.917 95.656,12.537 U2.15@95.656,10.417 ; C9.2 104.276,72.877 P12.2 ; C7.2 P10.2 ; P7.4 110.736,66.457 112.606,64.587 C4.2
  Bottom Layer w0.508: v1(20.066,31.115) 20.066,34.707 C3.2
  Bottom Layer w0.635: C22.1 41.36,112.321 v1(43.18,112.321) ; C18.1 v1(77.702,112.417) ; C14.1 v1(119.08,110.917)
  Bottom Layer w1.27: D6.2 31.824,111.707 32.131,112.014 32.131,114.115 U7.5 ; U6.5 66.324,113.323 D5.2 ; D4.2 101.824,109.571 102.304,110.051 U5.5
HMI_RST: D2.1 P2.6 | length 28.6
  Bottom Layer w0.203: D2.1 70.345,34.561 70.345,30.848 75.276,25.917 75.276,18.417 76.196,17.497 P2.6
HMI_RX: P2.2 TP11.1 U1.28 | length 15.4
  Bottom Layer w0.203: U1.28 70.276,21.737 70.276,18.417 70.776,17.917 TP11.1 70.776,8.797 P2.2
HMI_TX: P2.4 TP9.1 U1.30 | length 15.4
  Bottom Layer w0.203: U1.30 72.776,21.777 72.776,18.417 73.276,17.917 TP9.1 73.276,8.837 P2.4
IR_Data: P11.1 TP14.1 U1.40 | length 69.7
  Top Layer w0.203: U1.40 35.996,85.018 36.703,85.725 54.229,85.725 55.626,87.122 65.024,87.122 v1(66.294,88.392)
  Bottom Layer w0.203: v1(66.294,88.392) 67.818,89.916 80.518,89.916 89.408,81.026 92.707,81.026 P11.1 TP14.1
IR_FrontL: P9.1 TP17.1 U1.53 | length 51.7
  Top Layer w0.203: U1.53 54.991,82.632 54.991,84.836 56.007,85.852 66.675,85.852 70.739,89.916 91.567,89.916 94.107,87.376 94.107,86.126 P9.1
  Bottom Layer w0.203: P9.1 TP17.1
IR_FrontS: P10.1 TP20.1 U1.51 | length 68.4
  Top Layer w0.203: v1(66.802,76.2) 67.691,77.089 67.691,78.105 68.326,78.74 78.994,78.74 80.772,76.962 106.299,76.962 106.816,77.479 P10.1
  Bottom Layer w0.203: U1.51 51.236,77.669 52.705,76.2 v1(66.802,76.2) ; P10.1 TP20.1
IR_Left: P12.1 TP26.1 U1.72 | length 43.5
  Top Layer w0.203: v1(78.74,74.93) 106.045,74.93 106.856,74.119 P12.1
  Bottom Layer w0.203: U1.72 77.851,82.742 77.851,75.819 v1(78.74,74.93) ; P12.1 TP26.1
IR_Right: P13.1 TP23.1 U1.32 | length 62.3
  Top Layer w0.203: U1.32 74.295,23.196 74.295,24.765 87.884,38.354 87.884,60.96 94.316,67.392 v1(94.316,68.117)
  Bottom Layer w0.203: v1(94.316,68.117) P13.1 TP23.1
Logic_Batt: R4.1 R6.2 TP28.1 U1.38 | length 151
  Top Layer w0.203: TP28.1 4.776,101.417 3.276,102.917 3.276,106.917 3.776,107.417 4.776,107.417 ; R6.2 4.776,107.417 ; R4.1 4.776,107.417 ; v1(56.896,49.022) 64.643,49.022 75.184,38.481 v1(75.184,31.623)
  Bottom Layer w0.203: TP28.1 4.776,90.347 16.129,78.994 16.129,76.454 16.637,75.946 16.637,50.546 20.701,46.482 50.546,46.482 53.086,49.022 v1(56.896,49.022) ; v1(75.184,31.623) 81.716,25.091 U1.38
MEMS_MISO: TP16.1 U1.35 U4.22 | length 110.2
  Top Layer w0.203: U4.22 22.824,73.497 20.701,71.374 20.701,48.641 25.019,44.323 25.019,33.909 v1(27.813,31.115) ; v1(56.896,31.115) 65.659,31.115 72.898,23.876 72.898,22.352 73.533,21.717 77.916,21.717 U1.35
  Bottom Layer w0.203: v1(27.813,31.115) v1(56.896,31.115) ; U1.35 79.276,20.357 TP16.1
MEMS_MOSI: TP19.1 U1.36 U4.21 | length 121.8
  Top Layer w0.203: U4.21 23.332,70.957 21.717,69.342 21.717,49.657 26.543,44.831 26.543,37.211 v1(27.94,35.814) ; v1(57.531,35.814) 71.374,35.814 v1(72.39,34.798)
  Bottom Layer w0.203: TP19.1 18.276,76.497 23.816,70.957 U4.21 ; v1(27.94,35.814) v1(57.531,35.814) ; v1(72.39,34.798) 72.263,34.798 72.263,31.75 79.176,24.837 U1.36
MEMS_NSS: TP25.1 U1.54 U4.19 | length 49.2
  Bottom Layer w0.203: U4.19 23.531,65.877 22.606,66.802 22.606,68.58 23.749,69.723 34.798,69.723 42.037,76.962 48.641,76.962 49.911,78.232 49.911,81.788 50.755,82.632 52.451,82.632 U1.54 TP25.1
MEMS_SCK: TP22.1 U1.68 U4.20 | length 60.2
  Bottom Layer w0.203: U4.20 35.016,68.417 41.783,75.184 68.326,75.184 70.231,77.089 70.231,82.632 U1.68 71.776,84.177 TP22.1
"Motor _Batt": P8.4 TP7.1 U1.34 | length 43.7
  Top Layer w0.203: U1.34 76.636,24.693 89.154,37.211 89.154,45.72 97.816,54.382 P8.4
  Bottom Layer w0.203: TP7.1 97.776,54.957 P8.4
"Motor _Curr": P8.3 TP6.1 U1.37 | length 44.6
  Bottom Layer w0.203: U1.37 84.338,20.457 91.694,27.813 91.694,47.879 95.276,51.461 P8.3 TP6.1
NetC11_P: C11.P C15.P C19.P P14.1 R4.2 U5.1 U6.1 U7.1
NetC12_P: C12.P L1.2 L2.1 R5.2 | length 0.9
  Top Layer w1.5: L2.1@108.234,94.71 L2.1@109.102,94.71
NetC13_P: C13.P C14.2 F1.1 L2.2 | length 4.2
  Top Layer w0.635: v1(119.154,108.839) C13.P
  Bottom Layer w0.635: C14.2 117.354,108.839 v1(119.154,108.839)
NetC16_P: C16.P L3.2 L4.1 U6.4 | length 0.8
  Top Layer w1.5: L3.2 L3.2@68.026,101.167
NetC17_P: C17.P C18.2 F2.1 L4.2 | length 4.2
  Top Layer w0.635: v1(77.63,110.363) C17.P
  Bottom Layer w0.635: C18.2 75.83,110.363 v1(77.63,110.363)
NetC20_P: C20.P L5.2 L6.1 U7.4 | length 2.2
  Top Layer w0.635: L5.2 L5.2@34.139,100.917
  Top Layer w1.5: L6.1@37.844,96.098 L6.1@38.957,96.098
NetC21_P: C21.P C22.2 F3.1 L6.2 | length 4.1
  Top Layer w0.635: v1(43.18,110.236) 44.699,108.717 C21.P
  Bottom Layer w0.635: C22.2 v1(43.18,110.236)
NetD4_1: D4.1 L1.1 U5.2 | length 7.1
  Bottom Layer w1.27: D4.1 97.204,107.893 U5.2
NetD5_1: D5.1 L3.1 U6.2 | length 7.8
  Bottom Layer w1: D5.1 D5.1@60.876,107.565
  Bottom Layer w1.27: D5.1 60.228,109.758 61.136,110.666 U6.2
NetD6_1: D6.1 L5.1 U7.2 | length 7.8
  Bottom Layer w1.27: D6.1 26.846,108.035 U7.2
NetJP1_1: JP1.1 U3.6 | length 34.2
  Top Layer w0.203: v1(14.42,39.561) U3.6
  Bottom Layer w0.203: JP1.1 10.033,15.174 10.033,37.338 11.43,38.735 13.594,38.735 v1(14.42,39.561)
NetJP1_2: JP1.2 R2.2 R3.2 | length 35
  Top Layer w0.203: JP1.2 4.736,13.877 7.276,16.417 7.276,20.357 8.89,21.971 16.129,21.971 17.018,22.86 v1(17.018,23.749)
  Bottom Layer w0.203: R2.2 R3.2 14.276,31.917 17.018,29.175 v1(17.018,23.749)
NetJP2_2: JP2.2 U3.8 | length 38.2
  Top Layer w0.203: v1(9.398,37.973) 11.372,39.947 U3.8
  Bottom Layer w0.203: JP2.2 6.096,8.277 6.096,13.335 9.398,16.637 v1(9.398,37.973)
NetR5_1: R5.1 R7.2 U5.4 | length 9.9
  Top Layer w0.508: U5.4 100.604,111.105 101.854,109.855 105.214,109.855 ; R5.1 106.152,108.917 105.214,109.855 ; R7.2 105.214,109.855
PWM_1: P4.2 P8.1 TP3.1 U1.42 | length 104.1
  Top Layer w0.203: U1.42 39.751,82.742 39.751,61.087 v1(40.894,59.944) ; v1(56.388,59.309) 57.531,58.166 v1(79.502,58.166)
  Bottom Layer w0.203: v1(40.894,59.944) 55.753,59.944 v1(56.388,59.309) ; v1(79.502,58.166) 86.106,51.562 89.079,51.562 90.196,52.679 P8.1 90.276,54.997 TP3.1 90.276,59.034 91.059,59.817 102.997,59.817 106.776,56.038 P4.2
PWM_2: P8.2 TP4.1 U1.57 | length 77.2
  Top Layer w0.203: v1(52.451,58.166) 52.451,74.422 56.261,78.232 57.912,78.232 58.856,79.176 U1.57 ; v1(74.803,56.769) v1(79.121,56.769)
  Bottom Layer w0.203: v1(52.451,58.166) 53.848,56.769 v1(74.803,56.769) ; v1(79.121,56.769) 85.598,50.292 91.186,50.292 92.736,51.842 P8.2 92.776,54.957 TP4.1
PWM_IN_1: P6.2 TP29.1 U1.66 | length 61.2
  Top Layer w0.203: U1.66 69.016,86.034 69.723,86.741 84.963,86.741 88.011,83.693 88.265,83.947 v1(101.346,83.947)
  Bottom Layer w0.203: v1(101.346,83.947) 115.798,83.947 116.052,83.693 116.776,84.417 ; P6.2 116.776,84.417 ; TP29.1 123.276,85.417 121.776,83.917 117.276,83.917 116.776,84.417
PWM_IN_2: P3.2 TP32.1 U1.55 | length 76.5
  Top Layer w0.203: v1(69.088,77.343) 78.486,77.343 79.756,76.073 115.951,76.073 116.84,76.962 116.84,79.353 P3.2
  Bottom Layer w0.203: U1.55 56.316,77.741 56.714,77.343 v1(69.088,77.343) ; P3.2 116.776,78.417 117.776,77.417 121.276,77.417 TP32.1
Servo_PWM: P5.1 TP5.1 U1.61 | length 50.1
  Top Layer w0.203: U1.61 65.196,82.677 106.045,82.677 106.816,83.448 P5.1
  Bottom Layer w0.203: P5.1 TP5.1
Starter_RX: TP27.1 U1.73 U2.2 | length 61.4
  Top Layer w0.203: v1(100.203,65.278) 100.203,65.151 101.473,63.881 101.473,59.436 v1(102.108,58.801)
  Bottom Layer w0.203: U1.73 79.176,80.209 81.026,78.359 81.026,67.564 83.312,65.278 v1(100.203,65.278) ; v1(102.108,58.801) 102.362,58.547 102.362,52.07 105.015,49.417 TP27.1 111.607,48.086 U2.2@111.607,46.46
Starter_TX: TP24.1 U1.75 U2.1 | length 60.5
  Top Layer w0.203: v1(103.759,65.786) 104.648,64.897 104.648,60.071 v1(105.791,58.928)
  Bottom Layer w0.203: U1.75 81.716,79.574 82.296,78.994 82.296,69.342 84.963,66.675 103.124,66.675 103.759,66.04 v1(103.759,65.786) ; v1(105.791,58.928) 107.823,56.896 111.252,56.896 112.776,55.372 TP24.1 112.877,49.316 U2.1@112.877,46.46
Vonal_MISO: P1.4 TP13.1 U1.2 | length 16.2
  Bottom Layer w0.203: U1.2 37.276,21.717 37.276,16.417 TP13.1 39.776,8.617 P1.4
Vonal_MOSI: P1.6 TP15.1 U1.3 | length 13.7
  Bottom Layer w0.203: U1.3 38.536,17.657 TP15.1 42.116,13.757 P1.6
Vonal_NSS: P1.8 TP21.1 U1.17 | length 24.1
  Bottom Layer w0.203: P1.8 45.834,7.239 54.102,7.239 56.276,9.413 TP21.1 56.276,20.417 U1.17
Vonal_RST: D1.1 P1.10 | length 39.1
  Bottom Layer w0.203: P1.10 47.196,14.557 49.276,16.637 53.34,16.637 55.118,18.415 55.118,24.003 58.674,27.559 63.246,27.559 66.228,30.541 D1.1
Vonal_RX: P1.12 U1.63 | length 86.6
  Top Layer w0.203: v1(49.657,13.843) 49.911,14.097 53.594,14.097 53.975,14.478 53.975,16.129 55.118,17.272 55.118,73.914 57.531,76.327 65.151,76.327 66.476,77.652 U1.63
  Bottom Layer w0.203: v1(49.657,13.843) 49.657,8.496 P1.12
Vonal_SCK: P1.2 TP18.1 U1.1 | length 19.9
  Bottom Layer w0.203: TP18.1 33.276,8.917 33.776,8.417 P1.2 37.036,15.657 35.996,16.697 U1.1
Vonal_TX: P1.14 U1.44 | length 82.9
  Top Layer w0.203: U1.44 42.356,82.677 46.736,82.677 47.498,81.915 47.498,19.812 52.197,15.113 v1(52.324,15.113)
  Bottom Layer w0.203: P1.14 52.324,8.465 v1(52.324,15.113)
pads on no net: D1.2 D2.2 D3.2 U1.4 U1.5 U1.7 U1.9 U1.10 U1.11 U1.12 U1.13 U1.15 U1.16 U1.18 U1.23 U1.24 U1.25 U1.26 U1.27 U1.29 U1.31 U1.33 U1.39 U1.45 U1.46 U1.48 U1.49 U1.50 U1.52 U1.56 U1.60 U1.62 U1.64 U1.65 U1.67 U1.69 U1.74 U1.76 U2.5 U2.6 U2.7 U2.8 U2.9 U2.10 U2.11 U2.14 U2.17 U2.18 U2.19 U2.20 U2.21 U2.22 U3.1 U3.2 U3.4 U3.5 U3.7 U3.9 U3.10 U3.11 U3.12 U3.13 U3.14 U3.15 U3.16 U3.17 U3.18 U3.19 U3.20 U3.21 U3.22 U4.3 U4.6 U4.7 U4.8 U4.9 U4.10 U4.11 U4.12 U4.14 U4.15 U4.16 U4.17 U4.18 U4.23 U4.24

## Polygon pours and split planes (outlines as drawn)
GND on Top Layer "GND" (solid, pour order 20): 1.651,2.032 1.651,120.142 125.476,120.142 125.476,2.032
NetC12_P on Top Layer "NETC12_P_L01_P000" (solid, pour order 0): 98.806,97.282 104.521,91.567 110.236,91.567 112.141,93.472 112.141,104.394 113.538,105.791 113.538,108.966 110.49,108.966 108.966,107.442 102.489,107.442 98.806,103.759
NetC21_P on Top Layer "NETC21_P_L01_P001" (solid, pour order 1): 42.164,111.252 42.291,111.125 42.291,105.156 48.895,98.552 51.689,98.552 51.689,104.902 46.99,109.601 46.99,111.252
NetD5_1 on Top Layer "NETD5_1_L01_P002" (solid, pour order 2): 60.452,113.411 61.849,113.411 61.722,113.284 61.722,102.108 59.436,99.822 59.436,97.282 52.832,97.282 52.832,103.505 54.483,103.505 60.452,109.474
NetC16_P on Top Layer "NETC16_P_L01_P003" (solid, pour order 3): 63.881,113.411 65.151,113.411 65.151,110.617 65.532,110.236 73.152,110.236 73.152,107.188 77.47,102.87 77.47,102.362 72.136,97.028 65.024,97.028 63.881,98.171
NetC13_P on Top Layer "NETC13_P_L01_P004" (solid, pour order 4): 117.221,109.474 122.682,109.474 122.809,109.347 122.809,98.425 118.237,98.425 113.919,102.743 117.221,106.045
NetD4_1 on Top Layer "NETD4_1_L01_P005" (solid, pour order 5): 96.52,112.903 97.917,112.903 97.917,106.553 94.361,102.997 94.361,96.012 86.741,96.012 86.741,104.267 91.44,104.267 96.52,109.347
NetC17_P on Top Layer "NETC17_P_L01_P012" (solid, pour order 12): 69.342,94.996 69.342,93.218 79.883,93.218 82.169,90.932 82.931,90.932 86.36,94.361 86.233,94.361 81.026,99.568 81.026,110.236 80.01,111.252 76.962,111.252 76.2,110.49 76.2,109.474 79.121,106.553 79.121,100.203 73.914,94.996
NetD6_1 on Top Layer "NetD6_1" (solid, pour order 14): 26.162,114.3 27.559,114.3 27.559,97.282 16.891,97.282 16.891,104.267 23.876,104.267 23.876,108.077 26.162,108.077
NetC20_P on Top Layer "NetC20_P" (solid, pour order 16): 29.591,114.3 29.591,93.472 39.243,93.472 42.291,96.52 42.164,96.647 42.164,99.441 42.037,99.441 39.116,102.362 39.116,111.252 30.861,111.252 30.861,114.3
NetC11_P on Top Layer "BATT+" (solid, pour order 18): 3.81,118.872 3.81,110.871 6.731,110.871 6.731,109.728 8.382,108.077 13.716,108.077 15.621,109.982 15.621,112.522 16.256,112.522 16.891,113.157 25.146,113.157 25.781,113.792 25.781,116.205 49.276,116.205 49.911,115.57 49.911,112.141 59.69,112.141 59.69,116.078 86.106,116.078 86.106,111.76 95.885,111.76 96.012,111.887 95.885,112.014 95.885,118.872
GND on Bottom Layer "GND" (solid, pour order 22): 1.651,2.032 1.651,120.142 125.476,120.142 125.476,2.032

## Other copper
Top Layer:
  pour cut-out: 0.254,23.876 8.636,23.876 8.636,46.736 0.254,46.736
  pour cut-out: 122.301,50.292 122.301,5.842 140.716,5.842 140.716,50.292
Bottom Layer:
  pour cut-out: 0.254,23.876 8.636,23.876 8.636,46.736 0.254,46.736
  pour cut-out: 122.301,50.292 122.301,5.842 140.716,5.842 140.716,50.292

## Silkscreen, mask and mechanical layers (free items; w line width, h text height)
Top Overlay:
  lines w0.254: 3.236,3.417 18.236,3.417 18.236,15.917 3.236,15.917 3.236,3.417
  text "BT / Remove" at 17.236,5.417 h1.52 r90
  text "Ikarosz" at 89.789,2.794 h10
Mechanical 1:
  lines w0.508: 0.889,1.27 0.889,118.364 0.889,120.904 125.984,120.904 126.238,120.904 126.238,49.53 126.238,1.27 0.889,1.27
  text ".Pcb_File_Name_No_Path" at -14.224,-95.083 h1.52

## Text inside footprints (layer, text, board x,y; h text height)
U1: Top Overlay "CN7" at 34.218,19.187 h1.52 r90; Top Overlay "CN10" at 34.218,80.147 h1.52 r90